# EAGLE board adc (EAGLE 8.4.1)
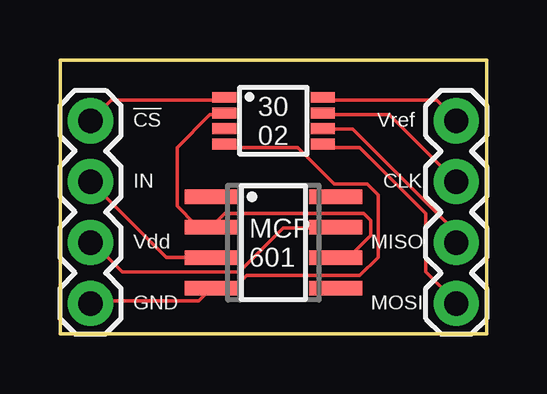
[diagram p0: board, top side]
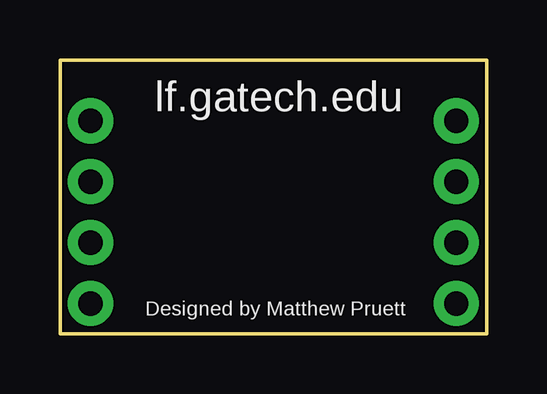
[diagram p1: board, bottom side, seen from below]

Size 17.78 x 11.43 mm. Coordinates in mm from the lower left corner, seen from the top.
Outline: 0,0 17.78,0 17.78,11.43 0,11.43 0,0
Copper layers (1*16): Top 0.0356mm / dielectric 1.5011mm / Bottom 0.0356mm
Design rules "oshpark-2layer": minimum track width 6mil, minimum drill 13mil, track to track 6mil, track to pad 6mil, pad to pad 6mil, via to via 6mil, smd to smd 6mil, copper to edge 15mil, drill to drill 6mil, minimum pad ring 7mil, minimum via ring 7mil, stop-mask expansion 2.5mil, vias tented up to drill 0mil, thermal gap 10mil

## Footprints (pad centres in the part's own frame; a part is rotated, then mirrored left to right if it is on the bottom)
1X04 = drill 1.016 pad 1.88: 1 0,0; 2 2.54,0; 3 5.08,0; 4 7.62,0
SO08 = smd 0.6 x 2.2: 1 -1.905,-2.6; 2 -0.635,-2.6; 3 0.635,-2.6; 4 1.905,-2.6; 5 1.905,2.6; 6 0.635,2.6; 7 -0.635,2.6; 8 -1.905,2.6
MSOP8 = smd 0.45 x 1: 1 -0.975,-2.05; 2 -0.325,-2.05; 3 0.325,-2.05; 4 0.975,-2.05; 5 0.975,2.05; 6 0.325,2.05; 7 -0.325,2.05; 8 -0.975,2.05

## Placement (x,y rotation side)
J1  Left  [1X04]  1.27,1.27 90 top
J2  Right  [1X04]  16.51,1.27 90 top
MCP601  MCP601SN  [SO08]  8.89,3.81 270 top
MCP3002  MCP3202MS  [MSOP8]  8.89,8.89 270 top

## Library data of the parts
J1 J2 = SparkFun-Connectors; PROD_ID: CONN-09696
MCP601 = linear
MCP3002 = microchip; MF: MICROCHIP; MPN: MCP3202-CI/MS; OC_FARNELL: unknown; OC_NEWARK: 68H9370

## Nets
N$1: MCP601.2 MCP601.6 MCP3002.2
N$2: J1.3 MCP601.3
N$4: J2.4 MCP3002.8
N$6: J2.3 MCP3002.7
N$7: J2.2 MCP3002.6
N$8: J2.1 MCP3002.5
N$9: J1.4 MCP3002.1
V+: J1.2 MCP601.7
V-: J1.1 MCP601.4 MCP3002.4

## Tracks (layer width: path | path; a pad name or v marks a point on that pad's centre or on a via)
N$1
  Top 0.152: MCP3002.2 6.71,9.14 6.25,9.14 4.88,7.77 4.88,5.33 5.64,4.57 6.25,4.57 MCP601.2 6.4,4.57 6.86,5.03 12.65,5.03 12.95,4.72 12.95,4.12 12.04,3.2 11.58,3.2 MCP601.6
N$2
  Top 0.152: J1.3 4.42,3.2 6.25,3.2 MCP601.3
N$4
  Top 0.152: MCP3002.8 10.97,9.75 15.7,9.75 16.46,8.99 J2.4
N$6
  Top 0.152: J2.3 13.72,9.14 10.97,9.14 MCP3002.7
N$7
  Top 0.152: MCP3002.6 10.97,8.53 12.19,8.53 16.46,4.27 16.46,3.81 J2.2
N$8
  Top 0.152: MCP3002.5 10.97,7.77 12.5,7.77 15.24,5.03 15.24,2.59 16.46,1.37 J2.1
N$9
  Top 0.152: J1.4 2.13,9.75 6.71,9.75 MCP3002.1
V+
  Top 0.152: MCP601.7 11.43,4.42 9.3,4.42 7.47,2.59 2.59,2.59 1.37,3.81 J1.2
V-
  Top 0.152: MCP3002.4 6.86,7.77 9.91,7.77 11.43,6.25 12.8,6.25 13.26,5.79 13.26,3.2 12.5,2.44 7.77,2.44 7.32,1.98 6.4,1.98 MCP601.4 6.25,1.83 5.79,1.37 1.37,1.37 J1.1

## Text on the board
tPlace: !CS | 30 / 02 | Vref | IN | CLK | Vdd | MISO | MCP / 601 | GND | MOSI
bPlace: lf.gatech.edu | Designed by Matthew Pruett